# Altium PCB classyTKL_SI_plate.PcbDoc
Units mm, origin at the board's own origin, x right, y up, seen from the top; angles counter-clockwise.
Board outline 351.66 x 133.83 mm, 2 copper layers (Component Side, Bottom Layer), stack 1.571 mm thick; 91 components, 128 nets, 201 pads, 0 vias.
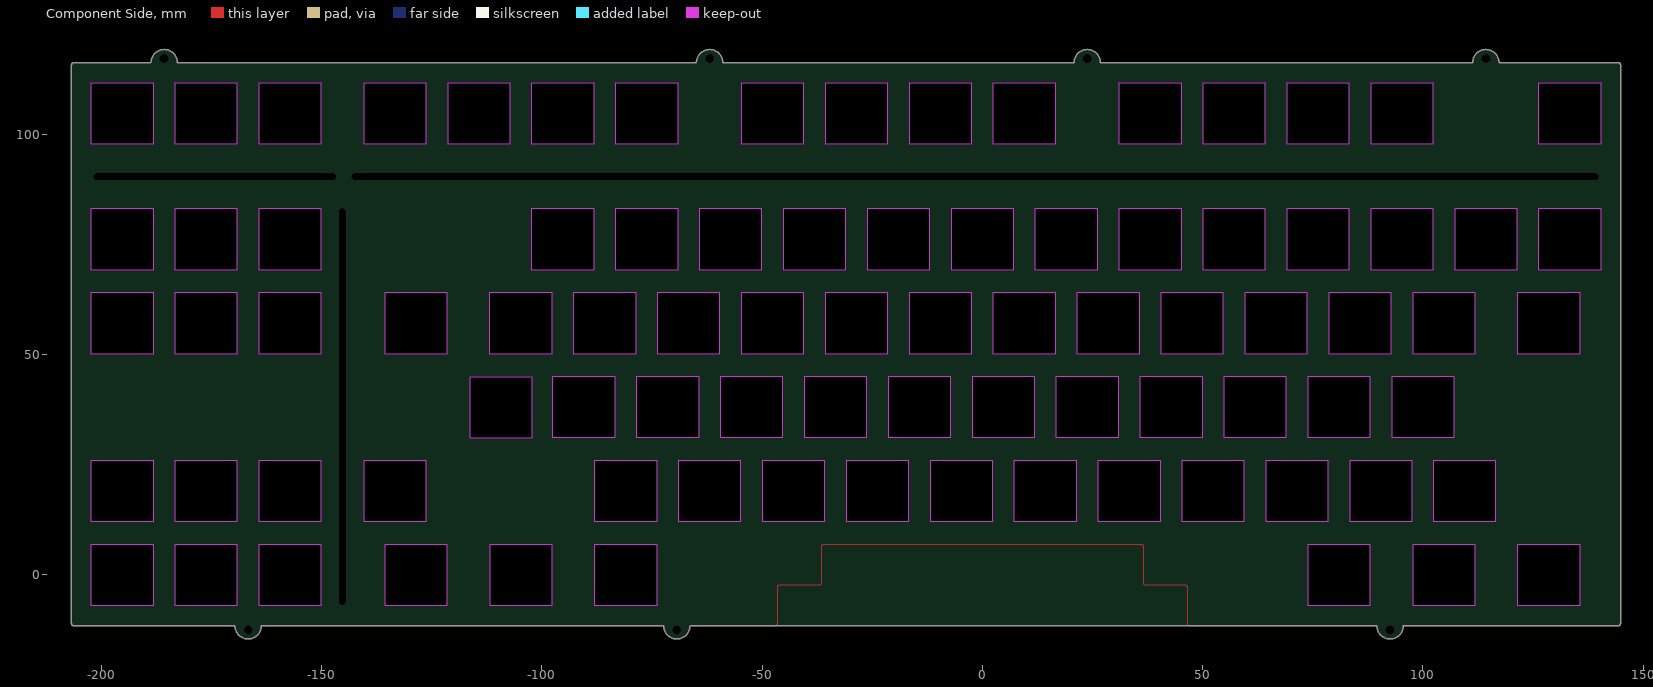
[diagram p0: Component Side view]
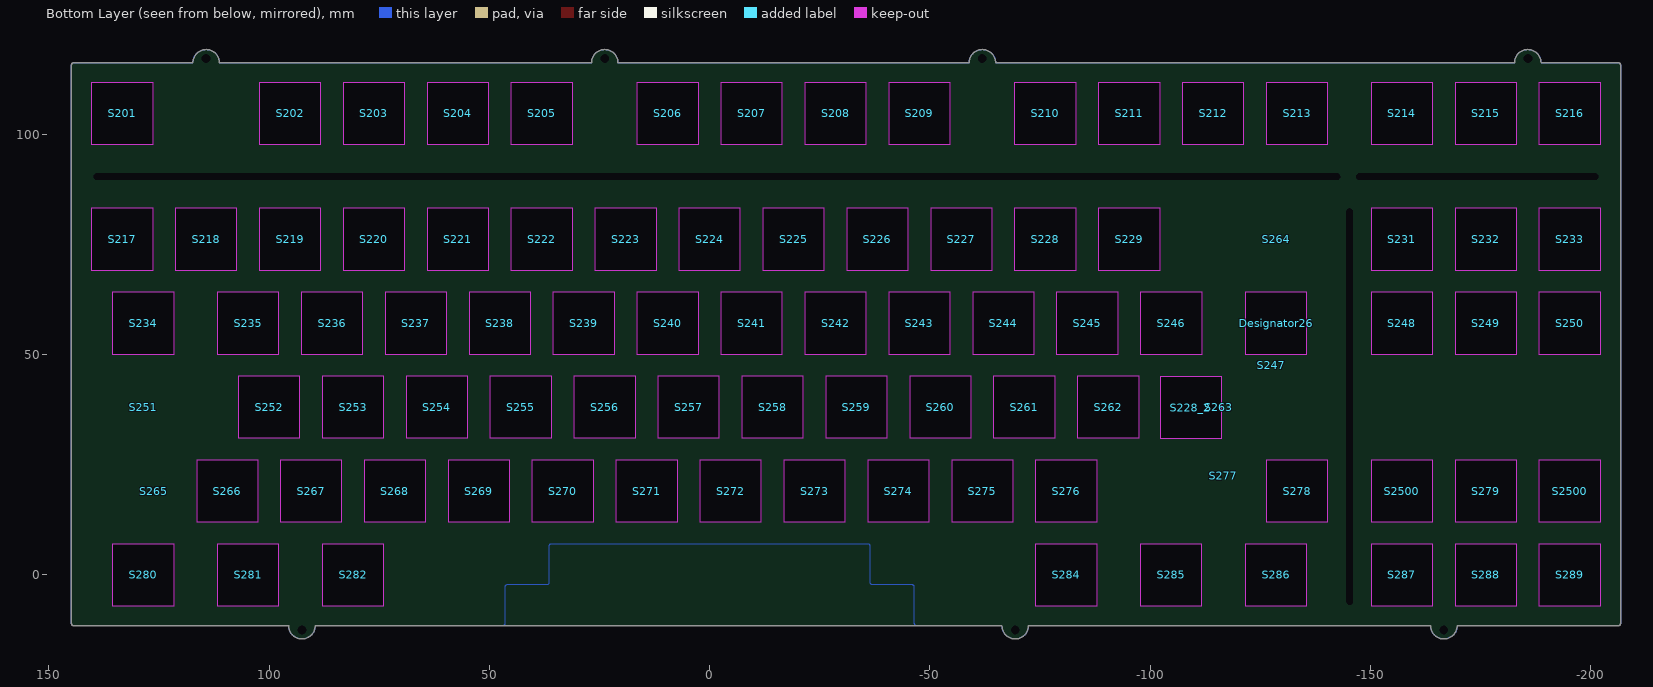
[diagram p1: Bottom Layer view, seen from below]

## Layer stack, top to bottom
Top Solder: solder mask 0.0102, Solder Resist, Dk 3.5
Component Side: signal copper 0.0356
Dielectric 1: core 1.5, FR-4, Dk 4.2
Bottom Layer: signal copper 0.0356
Solder Side: solder mask 0.0102, Solder Resist, Dk 3.5

## Board outline
-169.688,-11.535 ccw(c-166.698,-11.535) -166.698,-14.525 -166.678,-14.525 ccw(c-166.678,-11.535) -163.688,-11.535 -163.688,-11.527 -158.689,-11.535 -158.689,-11.525 -72.363,-11.525 -72.363,-11.535 ccw(c-69.373,-11.535) -69.373,-14.525 -69.353,-14.525 ccw(c-69.353,-11.535) -66.363,-11.535 -66.363,-11.525 89.555,-11.525 89.555,-11.535 ccw(c92.545,-11.535) 92.545,-14.525 92.565,-14.525 ccw(c92.565,-11.535) 95.555,-11.535 95.555,-11.525 96.762,-11.525 102.761,-11.526 102.761,-11.525 144.374,-11.525 ccw(c144.374,-11.025) 144.875,-11.025 144.875,115.8 ccw(c144.374,115.8) 144.374,116.3 117.299,116.3 117.299,116.31 ccw(c114.309,116.31) 114.309,119.3 114.289,119.3 ccw(c114.289,116.31) 111.3,116.31 111.3,116.3 102.761,116.3 96.762,116.31 96.762,116.3 26.812,116.3 26.812,116.31 ccw(c23.822,116.31) 23.822,119.3 23.802,119.3 ccw(c23.802,116.31) 20.812,116.31 20.812,116.3 -58.913,116.3 -58.913,116.31 ccw(c-61.903,116.31) -61.903,119.3 -61.923,119.3 ccw(c-61.923,116.31) -64.913,116.31 -64.913,116.3 -71.539,116.3 -77.539,116.31 -77.539,116.3 -182.738,116.3 -182.738,116.31 ccw(c-185.728,116.31) -185.728,119.3 -185.748,119.3 ccw(c-185.748,116.31) -188.738,116.31 -188.738,116.3 -206.288,116.3 ccw(c-206.288,115.8) -206.788,115.8 -206.788,-11.025 ccw(c-206.288,-11.025) -206.288,-11.525 -169.688,-11.525

## Design rules (kind name [scope] priority, off if disabled: settings)
Clearance [All] p1: gap=0.2 ignorepadtopadclearanceinfootprint=FALSE except(0: Arc-Hole Track-Hole SMDPad-Hole THPad-Hole Via-Hole Fill-Hole Poly-Hole Region-Hole Text-Hole; 0.254: THPad-THPad THPad-Via THPad-Fill THPad-Poly THPad-Region THPad-Text Via-Via Via-Fill Via-Poly Via-Region Via-Text Fill-Fill Fill-Poly Fill-Region Fill-Text Poly-Poly Poly-Region Poly-Text Region-Region Region-Text Text-Text)
ComponentClearance [InComponent('No Component') And OnLayer('Component Side')] p1: gap=0.254 collisioncheckmode=3 verticalgap=0.254 showdistances=FALSE
DiffPairsRouting DiffPairsRouting_USB [InDifferentialPairClass('All Differential Pairs')] p1: maxlimit=0.254 minlimit=0.203 mostfreqgap=0.203 toplayer_minwidth=0.152 toplayer_maxwidth=0.381 toplayer_prefwidth=0.152 bottomlayer_minwidth=0.152 bottomlayer_maxwidth=0.381 bottomlayer_prefwidth=0.152 maxuncoupledlength=12.7
DiffPairsRouting [All] p2: maxlimit=0.254 minlimit=0.254 mostfreqgap=0.254 toplayer_minwidth=0.381 toplayer_maxwidth=0.381 toplayer_prefwidth=0.381 bottomlayer_minwidth=0.381 bottomlayer_maxwidth=0.381 bottomlayer_prefwidth=0.381 maxuncoupledlength=12.7
HoleSize [All] p1: absolutevalues=TRUE maxlimit=20 minlimit=0.025 maxpercent=80.000 minpercent=20.000
MatchedLengths MatchedLengths_USB_DiffPairs_1 [All] p1: tolerance=0.127 checknetsindiffpair=TRUE checkdiffpairvsdiffpair=FALSE checkxsignals=FALSE checkothers=FALSE
MatchedLengths MatchedLengths_USB_DiffPairs [All] p2: tolerance=0.127 checknetsindiffpair=TRUE checkdiffpairvsdiffpair=FALSE checkxsignals=FALSE checkothers=FALSE
PolygonConnect PolygonConnect_1 [All vs IsVia] p1: connectstyle=Direct reliefconductorwidth=0.254 reliefentries=4 polygonreliefangle="90 Angle" airgapwidth=0.254
PolygonConnect [All] p2: connectstyle=Relief reliefconductorwidth=0.254 reliefentries=4 polygonreliefangle="90 Angle" airgapwidth=0.254
RoutingVias [All] p1: holewidth=0.711 width=1.27 viastyle="Through Hole" minholewidth=0.711 minwidth=1.27 maxholewidth=0.711 maxwidth=1.27
SolderMaskExpansion [All] p1: expansion=0.102 istentingtop=FALSE
Width [All] p1: maxlimit=0.254 minlimit=0.203 preferedwidth=0.254
27 further rules are at their usual default settings.

## Classes and differential pairs
differential pair D: +D_P -D_N
differential pair D_PRE: +D_PRE_P -D_PRE_N

## Components (designator, comment, footprint, x,y, rotation, side; value= is the part's Value field where it differs from the comment)
Designator26 "Comment" Plate_MX_1U -128.588,57.15 r180 bottom
S201 "MX" Plate_MX_1U 133.349,104.775 r180 bottom
S202 "MX" Plate_MX_1U 95.249,104.775 r180 bottom
S203 "MX" Plate_MX_1U 76.199,104.775 r180 bottom
S204 "MX" Plate_MX_1U 57.149,104.775 r180 bottom
S205 "MX" Plate_MX_1U 38.099,104.775 r180 bottom
S206 "MX" Plate_MX_1U 9.494,104.775 r180 bottom
S207 "MX" Plate_MX_1U -9.526,104.775 r180 bottom
S208 "MX" Plate_MX_1U -28.576,104.775 r180 bottom
S209 "MX" Plate_MX_1U -47.626,104.775 r180 bottom
S210 "MX" Plate_MX_1U -76.201,104.775 r180 bottom
S211 "MX" Plate_MX_1U -95.251,104.775 r180 bottom
S212 "MX" Plate_MX_1U -114.301,104.775 r180 bottom
S213 "MX" Plate_MX_1U -133.351,104.775 r180 bottom
S214 "MX" Plate_MX_1U -157.162,104.775 r180 bottom
S215 "MX" Plate_MX_1U -176.213,104.775 r180 bottom
S216 "MX" Plate_MX_1U -195.263,104.775 r180 bottom
S217 "MX" Plate_MX_1U 133.349,76.2 r180 bottom
S218 "MX" Plate_MX_1U 114.299,76.2 r180 bottom
S219 "MX" Plate_MX_1U 95.249,76.2 r180 bottom
S220 "MX" Plate_MX_1U 76.199,76.2 r180 bottom
S221 "MX" Plate_MX_1U 57.149,76.2 r180 bottom
S222 "MX" Plate_MX_1U 38.099,76.2 r180 bottom
S223 "MX" Plate_MX_1U 19.049,76.2 r180 bottom
S224 "MX" Plate_MX_1U -0.001,76.2 r180 bottom
S225 "MX" Plate_MX_1U -19.051,76.2 r180 bottom
S226 "MX" Plate_MX_1U -38.101,76.2 r180 bottom
S227 "MX" Plate_MX_1U -57.151,76.2 r180 bottom
S228 "MX" Plate_MX_1U -76.201,76.2 r180 bottom
S228_2 "MX" Plate_MX_1U -109.25,38 r180 bottom
S229 "MX" Plate_MX_1U -95.251,76.2 r180 bottom
S231 "MX" Plate_MX_1U -157.162,76.2 r180 bottom
S232 "MX" Plate_MX_1U -176.213,76.2 r180 bottom
S233 "MX" Plate_MX_1U -195.263,76.2 r180 bottom
S234 "MX" Plate_MX_1U 128.587,57.15 r180 bottom
S235 "MX" Plate_MX_1U 104.774,57.15 r180 bottom
S236 "MX" Plate_MX_1U 85.724,57.15 r180 bottom
S237 "MX" Plate_MX_1U 66.674,57.15 r180 bottom
S238 "MX" Plate_MX_1U 47.624,57.15 r180 bottom
S239 "MX" Plate_MX_1U 28.574,57.15 r180 bottom
S240 "MX" Plate_MX_1U 9.524,57.15 r180 bottom
S241 "MX" Plate_MX_1U -9.526,57.15 r180 bottom
S242 "MX" Plate_MX_1U -28.576,57.15 r180 bottom
S243 "MX" Plate_MX_1U -47.626,57.15 r180 bottom
S244 "MX" Plate_MX_1U -66.676,57.15 r180 bottom
S245 "MX" Plate_MX_1U -85.726,57.15 r180 bottom
S246 "MX" Plate_MX_1U -104.776,57.15 r180 bottom
S247 "MX" "PLATE_MX - ISO_ENTER" -128.588,57.15 r0 bottom
S248 "MX" Plate_MX_1U -157.162,57.15 r180 bottom
S249 "MX" Plate_MX_1U -176.213,57.15 r180 bottom
S250 "MX" Plate_MX_1U -195.263,57.15 r180 bottom
S251 "MX" "PLATE_MX - CAPS_stepped_Dual" 126.206,38.1 r180 bottom
S252 "MX" Plate_MX_1U 100.012,38.1 r180 bottom
S253 "MX" Plate_MX_1U 80.962,38.1 r180 bottom
S254 "MX" Plate_MX_1U 61.912,38.1 r180 bottom
S255 "MX" Plate_MX_1U 42.862,38.1 r180 bottom
S256 "MX" Plate_MX_1U 23.812,38.1 r180 bottom
S257 "MX" Plate_MX_1U 4.762,38.1 r180 bottom
S258 "MX" Plate_MX_1U -14.288,38.1 r180 bottom
S259 "MX" Plate_MX_1U -33.338,38.1 r180 bottom
S260 "MX" Plate_MX_1U -52.388,38.1 r180 bottom
S261 "MX" Plate_MX_1U -71.438,38.1 r180 bottom
S262 "MX" Plate_MX_1U -90.488,38.1 r180 bottom
S263 "MX" "PLATE_MX - ENTER_ANSI_ISO_KEY_V2" -121.451,38.1 r180 bottom
S264 "MX" "PLATE_MX - backspace" -123.826,76.2 r180 bottom
S265 "MX" "PLATE_MX - Left shift rotated stab" 121.443,19.05 r180 bottom
S266 "MX" Plate_MX_1U 109.479,19.05 r180 bottom
S267 "MX" Plate_MX_1U 90.487,19.05 r180 bottom
S268 "MX" Plate_MX_1U 71.437,19.05 r180 bottom
S269 "MX" Plate_MX_1U 52.387,19.05 r180 bottom
S270 "MX" Plate_MX_1U 33.337,19.05 r180 bottom
S271 "MX" Plate_MX_1U 14.287,19.05 r180 bottom
S272 "MX" Plate_MX_1U -4.763,19.05 r180 bottom
S273 "MX" Plate_MX_1U -23.813,19.05 r180 bottom
S274 "MX" Plate_MX_1U -42.862,19.05 r180 bottom
S275 "MX" Plate_MX_1U -61.913,19.05 r180 bottom
S276 "MX" Plate_MX_1U -80.963,19.05 r180 bottom
S277 "MX" "PLATE_MX - right shift" -116.581,19.05 r180 bottom
S278 "MX" Plate_MX_1U -133.351,19.05 r180 bottom
S279 "MX" Plate_MX_1U -176.213,19.05 r180 bottom
S280 "MX" Plate_MX_1U 128.587,0 r180 bottom
S281 "MX" Plate_MX_1U 104.775,0 r180 bottom
S282 "MX" Plate_MX_1U 80.962,0 r180 bottom
S284 "MX" Plate_MX_1U -80.962,0 r180 bottom
S285 "MX" Plate_MX_1U -104.775,0 r180 bottom
S286 "MX" Plate_MX_1U -128.588,0 r180 bottom
S287 "MX" Plate_MX_1U -157.163,0 r180 bottom
S288 "MX" Plate_MX_1U -176.213,0 r180 bottom
S289 "MX" Plate_MX_1U -195.263,0 r180 bottom
S2500 "MX" Plate_MX_1U -157.163,19.05 r0 bottom (schematic designator S250)
S2500 "MX" Plate_MX_1U -195.263,19.05 r0 bottom (schematic designator S250)

## Footprints (in the part's own frame and the unit in brackets; to place one, negate y for a bottom-side part, rotate by r counter-clockwise, add the part's x,y. Pads: shape width x height; smd on the part's side, far side on the other; paste and mask are expansions set on the pad)
"PLATE_MX - backspace" [mm]
  round 1 on Mech14: ""(0,0) ""(0,0) ""(0,0) ""(9.525,0) ""(9.525,0) ""(9.525,0)
"PLATE_MX - CAPS_stepped_Dual" [mm]
  round 1 on Mech14: ""(-4.763,0) ""(0,0)
"PLATE_MX - ENTER_ANSI_ISO_KEY_V2" [mm]
  round 1 on Mech14: ""(-11.652,-0.032) ""(-11.652,-0.032) ""(0,0) ""(0,0)
"PLATE_MX - ISO_ENTER" [mil]
  round 39.37 on Mech14: ""(-93.75,375)
  round 120 on Mech14: ""(181.25,-95) ""(181.25,845)
"PLATE_MX - Left shift rotated stab" [mm]
  round 1 on Mech14: ""(-9.525,0) ""(0,0)
"PLATE_MX - right shift" [mil]
  round 120 on Mech14: ""(-470,275) ""(470,275)
  round 39.37 on Mech14: ""(-375,0) ""(0,0)
Plate_MX_1U [mm]
  round 1 on Mech14: ""(0,0) ""(0,0)
  Component Side pour cut-out: -7,-7 7,-7 7,7 -7,7
  Keep-Out Layer board cut-out: -7,-7 7,-7 7,7 -7,7

## Part data
S201 S202 S203 S204 S205 S206 S207 S208 S209 S210 S211 S212 S213 S214 S215 S216 S217 S218 S219 S220 S221 S222 S223 S224 S225 S226 S227 S228 S228_2 S229 S231 S232 S233 S235 S236 S237 S238 S239 S240 S241 S242 S243 S244 S245 S246 S247 S248 S249 S250 S251 S252 S253 S254 S255 S256 S257 S258 S259 S260 S261 S262 S263 S264 S265 S266 S267 S268 S269 S270 S271 S272 S273 S274 S275 S276 S277 S278 S279 S280 S281 S282 S284 S285 S286 S287 S288 S289 S2500 S2500: library part SW-PB, "Switch"
S234: library part SW-PB, "TAB"

## Free pads (board coordinates)
  round 0 hole 1.5 slot 55 at 0 deg: 3(-174.244,90.424)
  round 0 hole 1.5 slot 90 at 90 deg: 3(-145.288,38.227)
  round 0 hole 1.5 slot 283 at 0 deg: 3(-1.643,90.424)
  round 1.152 hole 2 unplated paste+0.148 mask+0.148: ""(-185.748,117.275) ""(-166.678,-12.5) ""(-69.373,-12.5) ""(-61.903,117.275) ""(23.802,117.275) ""(92.545,-12.5) ""(114.309,117.275)

## Nets (pads, with @x,y where several pads share a name; then routed paths per layer and width w, separated by ;. In a path a pad name is that pad's centre, name@x,y a point inside that pad or via, vN(x,y) a via of type N, cw(c..) or ccw(c..) an arc to the next point about the centre after c; other vN are vias at no path point)
caps_led: 
col1: 
col2: 
col3: 
col4: 
col5: 
col6: 
col7: 
col8: 
col9: 
col10: 
col11: 
col12: 
col13: 
col14: 
col15: 
col16: 
col17: 
D_N: 
D_P: 
D_PRE_N: 
D_PRE_P: 
GND: 
NetC301_2: 
NetC307_2: 
NetC308_2: 
NetD201_1: 
NetD202_1: 
NetD203_1: 
NetD204_1: 
NetD205_1: 
NetD206_1: 
NetD207_1: 
NetD208_1: 
NetD209_1: 
NetD210_1: 
NetD211_1: 
NetD212_1: 
NetD213_1: 
NetD214_1: 
NetD215_1: 
NetD216_1: 
NetD217_1: 
NetD218_1: 
NetD219_1: 
NetD220_1: 
NetD221_1: 
NetD222_1: 
NetD223_1: 
NetD224_1: 
NetD225_1: 
NetD226_1: 
NetD227_1: 
NetD228_1: 
NetD229_1: 
NetD230_1: 
NetD231_1: 
NetD232_1: 
NetD233_1: 
NetD234_1: 
NetD235_1: 
NetD236_1: 
NetD237_1: 
NetD238_1: 
NetD239_1: 
NetD240_1: 
NetD241_1: 
NetD242_1: 
NetD243_1: 
NetD244_1: 
NetD245_1: 
NetD246_1: 
NetD247_1: 
NetD248_1: 
NetD249_1: 
NetD250_1: 
NetD251_1: 
NetD252_1: 
NetD253_1: 
NetD254_1: 
NetD255_1: 
NetD256_1: 
NetD257_1: 
NetD258_1: 
NetD259_1: 
NetD260_1: 
NetD261_1: 
NetD262_1: 
NetD263_1: 
NetD264_1: 
NetD265_1: 
NetD266_1: 
NetD267_1: 
NetD268_1: 
NetD269_1: 
NetD270_1: 
NetD271_1: 
NetD272_1: 
NetD273_1: 
NetD274_1: 
NetD275_1: 
NetD276_1: 
NetD277_1: 
NetD278_1: 
NetD279_1: 
NetD280_1: 
NetD281_1: 
NetD282_1: 
NetD283_1: 
NetD284_1: 
NetD285_1: 
NetD286_1: 
NetD287_1: 
NetD288_1: 
NetD289_1: 
NetD302_1: 
NetD303_1: 
NetR302_1: 
PC7: 
PF0: 
PF1: 
PF4: 
PF5: 
PF6: 
RAW: 
RST: 
scroll_led: 
VCC: 
pads on no net: Designator26. S201. S202. S203. S204. S205. S206. S207. S208. S209. S210. S211. S212. S213. S214. S215. S216. S217. S218. S219. S220. S221. S222. S223. S224. S225. S226. S227. S228. S228_2. S229. S231. S232. S233. S234. S235. S236. S237. S238. S239. S240. S241. S242. S243. S244. S245. S246. S247. S248. S249. S250. S251. S252. S253. S254. S255. S256. S257. S258. S259. S260. S261. S262. S263. S264. S265. S266. S267. S268. S269. S270. S271. S272. S273. S274. S275. S276. S277. S278. S279. S280. S281. S282. S284. S285. S286. S287. S288. S289. S2500.

## Polygon pours and split planes (outlines as drawn)
no net on Bottom Layer "Bottom Layer-No Net" (solid, shelved, pour order 0): -166.698,-14.525 -166.678,-14.525 ccw(c-166.678,-11.535) -163.688,-11.535 -163.688,-11.527 -158.689,-11.535 -158.689,-11.525 -72.363,-11.525 -72.363,-11.535 ccw(c-69.373,-11.535) -69.373,-14.525 -69.353,-14.525 ccw(c-69.353,-11.535) -66.363,-11.535 -66.363,-11.525 -47.001,-11.525 ccw(c-47.001,-11.025) -46.501,-11.025 -46.501,-2.762 cw(c-46,-2.762) -46,-2.262 -37.001,-2.262 ccw(c-37.001,-1.763) -36.501,-1.763 -36.501,6.5 cw(c-36,6.5) -36,7 35.999,7 cw(c35.999,6.5) 36.5,6.5 36.5,-1.763 ccw(c36.999,-1.763) 36.999,-2.262 45.999,-2.262 cw(c45.999,-2.763) 46.5,-2.762 46.5,-11.025 46.499,-11.025 ccw(c46.999,-11.025) 46.999,-11.525 89.555,-11.525 89.555,-11.535 ccw(c92.545,-11.535) 92.545,-14.525 92.565,-14.525 ccw(c92.565,-11.535) 95.555,-11.535 95.555,-11.525 96.762,-11.525 102.761,-11.526 102.761,-11.525 144.374,-11.525 ccw(c144.374,-11.025) 144.875,-11.025 144.875,115.8 ccw(c144.374,115.8) 144.374,116.3 117.299,116.3 117.299,116.31 ccw(c114.309,116.31) 114.309,119.3 114.289,119.3 ccw(c114.289,116.31) 111.3,116.31 111.3,116.3 102.761,116.3 96.762,116.31 96.762,116.3 26.812,116.3 26.812,116.31 ccw(c23.822,116.31) 23.822,119.3 23.802,119.3 ccw(c23.802,116.31) 20.812,116.31 20.812,116.3 -58.913,116.3 -58.913,116.31 ccw(c-61.903,116.31) -61.903,119.3 -61.923,119.3 ccw(c-61.923,116.31) -64.913,116.31 -64.913,116.3 -71.539,116.3 -77.539,116.31 -77.539,116.3 -182.738,116.3 -182.738,116.31 ccw(c-185.728,116.31) -185.728,119.3 -185.748,119.3 ccw(c-185.748,116.31) -188.738,116.31 -188.738,116.3 -206.288,116.3 ccw(c-206.288,115.8) -206.788,115.8 -206.788,-11.025 ccw(c-206.288,-11.025) -206.288,-11.525 -169.688,-11.525 -169.688,-11.535 ccw(c-166.698,-11.535)
no net on Component Side "Component Side-No Net" (solid, shelved, pour order 1): -166.698,-14.525 -166.678,-14.525 ccw(c-166.678,-11.535) -163.688,-11.535 -163.688,-11.527 -158.689,-11.535 -158.689,-11.525 -72.363,-11.525 -72.363,-11.535 ccw(c-69.373,-11.535) -69.373,-14.525 -69.353,-14.525 ccw(c-69.353,-11.535) -66.363,-11.535 -66.363,-11.525 -47.001,-11.525 ccw(c-47.001,-11.025) -46.501,-11.025 -46.501,-2.762 cw(c-46,-2.762) -46,-2.262 -37.001,-2.262 ccw(c-37.001,-1.763) -36.501,-1.763 -36.501,6.5 cw(c-36,6.5) -36,7 35.999,7 cw(c35.999,6.5) 36.5,6.5 36.5,-1.763 ccw(c36.999,-1.763) 36.999,-2.262 45.999,-2.262 cw(c45.999,-2.763) 46.5,-2.762 46.5,-11.025 46.499,-11.025 ccw(c46.999,-11.025) 46.999,-11.525 89.555,-11.525 89.555,-11.535 ccw(c92.545,-11.535) 92.545,-14.525 92.565,-14.525 ccw(c92.565,-11.535) 95.555,-11.535 95.555,-11.525 96.762,-11.525 102.761,-11.526 102.761,-11.525 144.374,-11.525 ccw(c144.374,-11.025) 144.875,-11.025 144.875,115.8 ccw(c144.374,115.8) 144.374,116.3 117.299,116.3 117.299,116.31 ccw(c114.309,116.31) 114.309,119.3 114.289,119.3 ccw(c114.289,116.31) 111.3,116.31 111.3,116.3 102.761,116.3 96.762,116.31 96.762,116.3 26.812,116.3 26.812,116.31 ccw(c23.822,116.31) 23.822,119.3 23.802,119.3 ccw(c23.802,116.31) 20.812,116.31 20.812,116.3 -58.913,116.3 -58.913,116.31 ccw(c-61.903,116.31) -61.903,119.3 -61.923,119.3 ccw(c-61.923,116.31) -64.913,116.31 -64.913,116.3 -71.539,116.3 -77.539,116.31 -77.539,116.3 -182.738,116.3 -182.738,116.31 ccw(c-185.728,116.31) -185.728,119.3 -185.748,119.3 ccw(c-185.748,116.31) -188.738,116.31 -188.738,116.3 -206.288,116.3 ccw(c-206.288,115.8) -206.788,115.8 -206.788,-11.025 ccw(c-206.288,-11.025) -206.288,-11.525 -169.688,-11.525 -169.688,-11.535 ccw(c-166.698,-11.535)

## Silkscreen, mask and mechanical layers (free items; w line width, h text height)
outline:
  lines w0.254: 102.761,-11.525 144.374,-11.525 ccw(c144.374,-11.025) 144.875,-11.025 144.875,115.8 ccw(c144.374,115.8) 144.374,116.3 117.299,116.3 117.299,116.31 ccw(c114.309,116.31) 114.309,119.3 114.289,119.3 ccw(c114.289,116.31) 111.3,116.31 111.3,116.3 102.761,116.3 96.762,116.31 96.762,116.3 26.812,116.3 26.812,116.31 ccw(c23.822,116.31) 23.822,119.3 23.802,119.3 ccw(c23.802,116.31) 20.812,116.31 20.812,116.3 -58.913,116.3 -58.913,116.31 ccw(c-61.903,116.31) -61.903,119.3 -61.923,119.3 ccw(c-61.923,116.31) -64.913,116.31 -64.913,116.3 -71.539,116.3 -77.539,116.31 -77.539,116.3 -182.738,116.3 -182.738,116.31 ccw(c-185.728,116.31) -185.728,119.3 -185.748,119.3 ccw(c-185.748,116.31) -188.738,116.31 -188.738,116.3 -206.288,116.3 ccw(c-206.288,115.8) -206.788,115.8 -206.788,-11.025 ccw(c-206.288,-11.025) -206.288,-11.525 -169.688,-11.525 -169.688,-11.535 ccw(c-166.698,-11.535) -166.698,-14.525 -166.678,-14.525 ccw(c-166.678,-11.535) -163.688,-11.535 -163.688,-11.527 -158.689,-11.535 -158.689,-11.525 -72.363,-11.525 -72.363,-11.535 ccw(c-69.373,-11.535) -69.373,-14.525 -69.353,-14.525 ccw(c-69.353,-11.535) -66.363,-11.535 -66.363,-11.525 -47.001,-11.525 46.999,-11.525 89.555,-11.525 89.555,-11.535 ccw(c92.545,-11.535) 92.545,-14.525 92.565,-14.525 ccw(c92.565,-11.535) 95.555,-11.535 95.555,-11.525 96.762,-11.525 102.761,-11.526 ; 102.761,-11.526 102.761,-11.525
Mechanical 3:
  drawing of 5600 lines, arcs and shapes, not listed
Mechanical 7:
  drawing of 998 lines, arcs and shapes, not listed
Mechanical 14:
  lines w0.2: -62.372,7.984 cw(c-61.398,7.984) -61.398,8.958 ; -62.344,7.956 -62.344,-5.406 ccw(c-61.232,-5.406) -61.232,-6.518 -53.822,-6.518 ccw(c-53.822,-5.544) -52.848,-5.544 ; -61.386,8.97 -53.834,8.97 cw(c-53.834,7.996) -52.86,7.996 -52.86,-5.532 ; 52.788,7.984 cw(c53.762,7.984) 53.762,8.958 ; 52.816,7.956 52.816,-5.406 ccw(c53.928,-5.406) 53.928,-6.518 61.338,-6.518 ccw(c61.338,-5.544) 62.312,-5.544 ; 53.774,8.97 61.326,8.97 cw(c61.326,7.996) 62.3,7.996 62.3,-5.532 ; -61.312,-5.53 -53.788,-5.53 -53.788,7.97 -61.312,7.97 -61.312,-5.53 ; 53.788,-5.53 61.312,-5.53 61.312,7.97 53.788,7.97 53.788,-5.53
  lines w0.254: -202.311,31.115 -202.311,45.085 -150.114,45.085 -150.114,31.115 -202.311,31.115
Mechanical 16:
  lines w0.254: -202.311,31.115 -202.311,45.085 -150.114,45.085 -150.114,31.115 -202.311,31.115